# Altium PCB PCB.PcbDoc
Units mm, origin at the board's own origin, x right, y up, seen from the top; angles counter-clockwise.
Board outline 100 x 50 mm, 2 copper layers (Top Layer, Bottom Layer); 45 components, 24 nets, 126 pads, 14 vias.
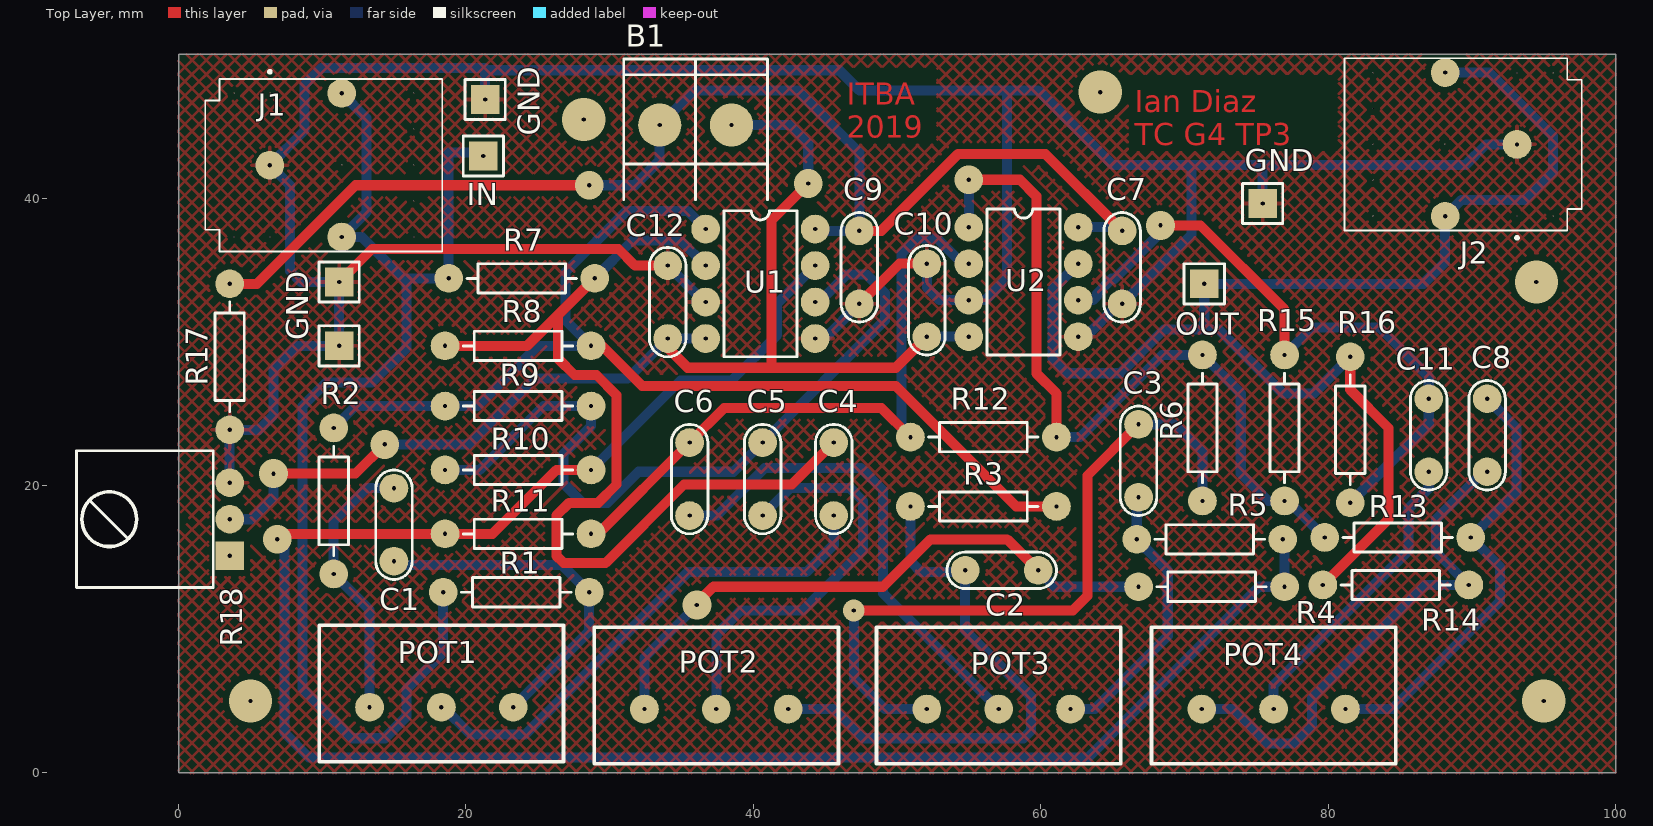
[diagram p0: Top Layer view]
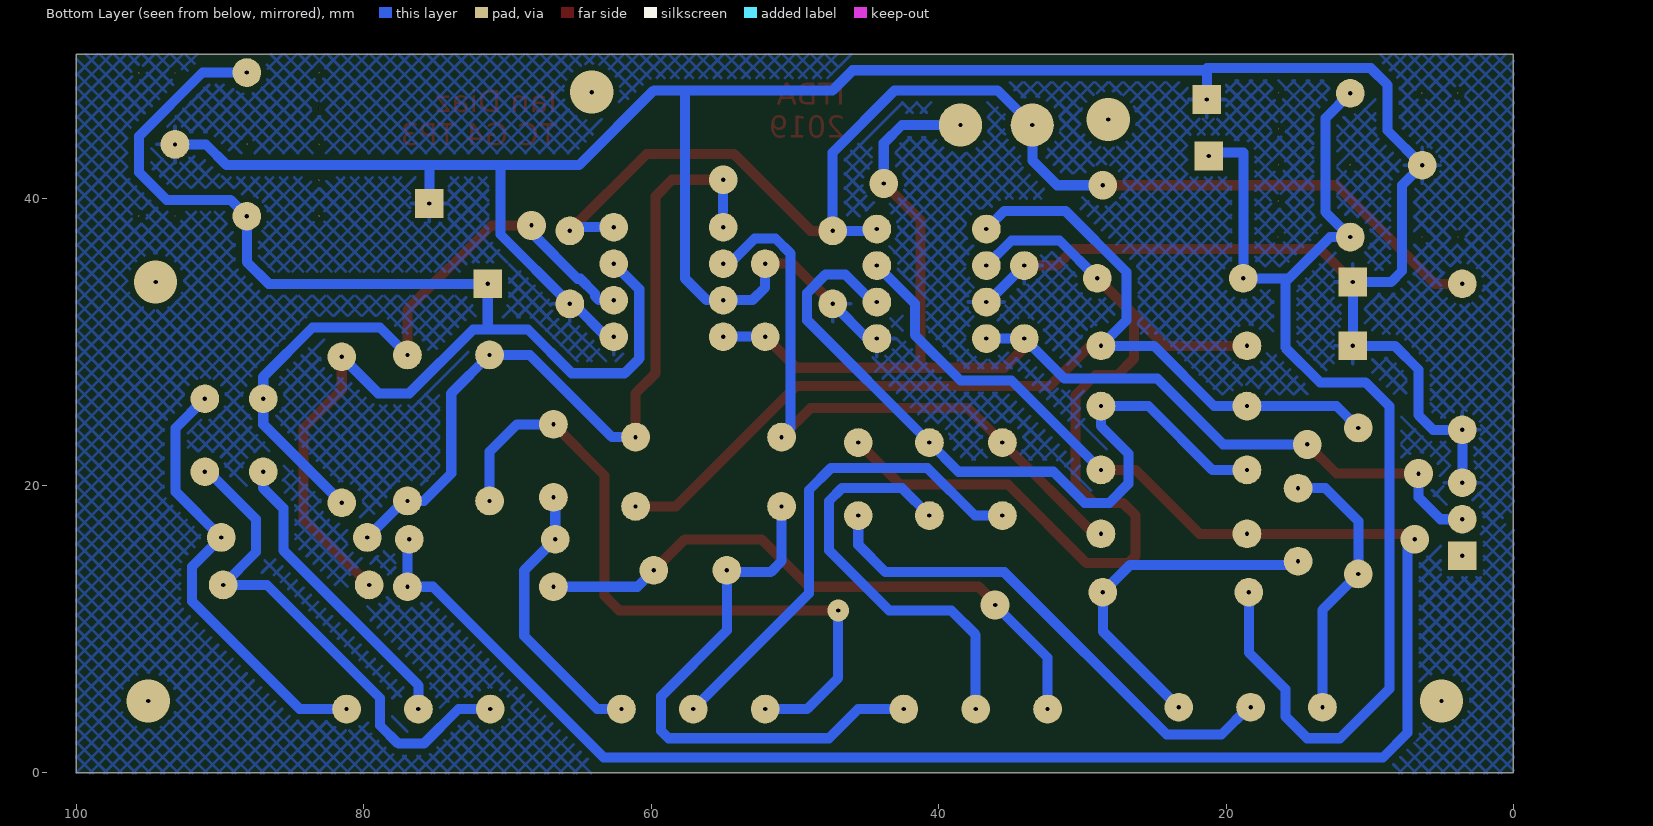
[diagram p1: Bottom Layer view, seen from below]
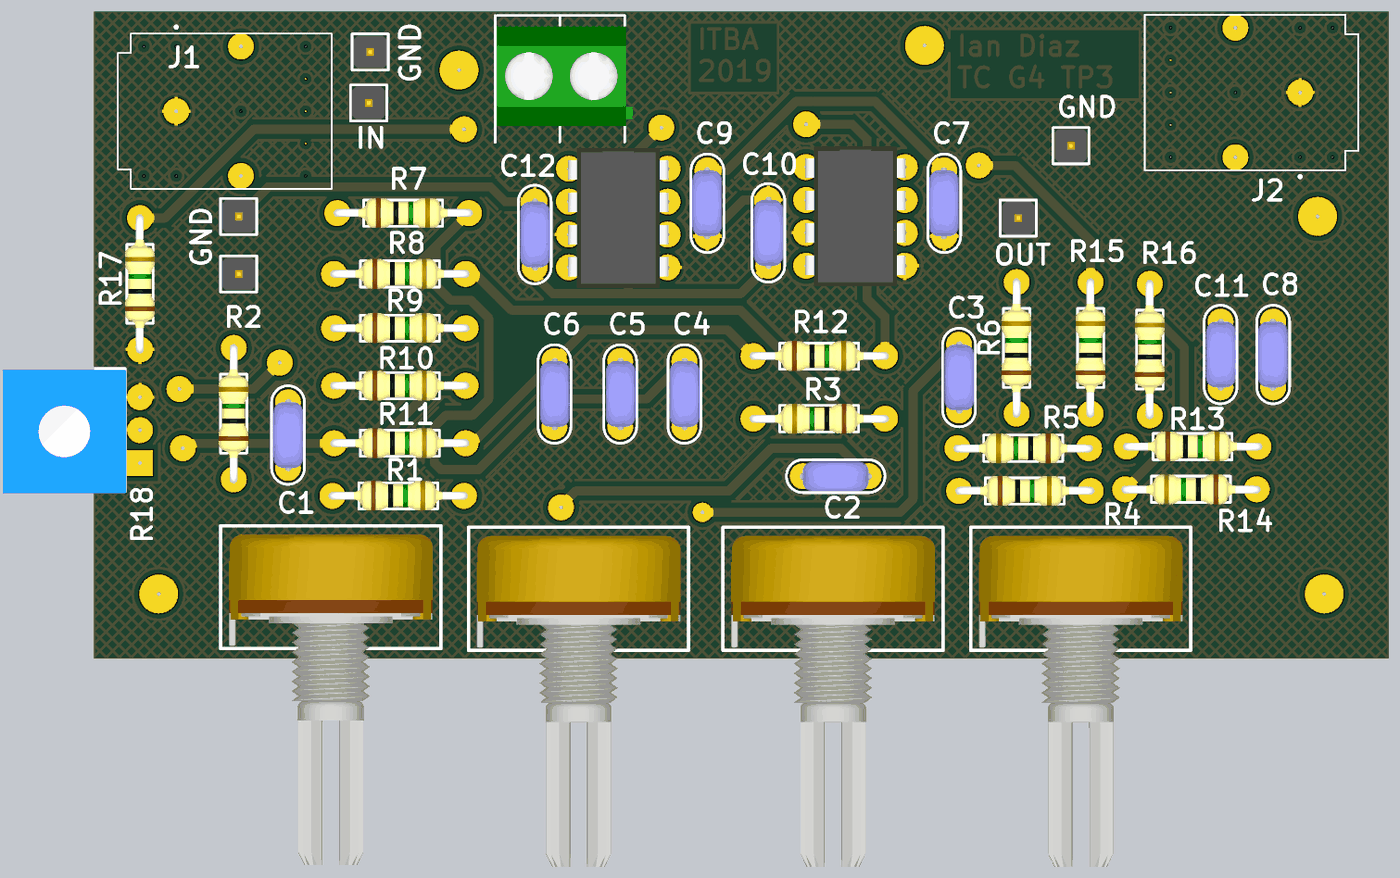
[diagram p2: 3D render of the assembled board from above, using the file's embedded part models]

## Layer stack, top to bottom
Top Solder: solder mask 0.0102, Solder Resist, Dk 3.5
Top Layer: signal copper 0.0356
Dielectric 1: dielectric 0.32, FR-4, Dk 4.8
Bottom Layer: signal copper 0.0356
Bottom Solder: solder mask 0.0102, Solder Resist, Dk 3.5

## Board outline
0,0 0,50 100,50 100,0

## Design rules (kind name [scope] priority, off if disabled: settings)
Clearance [All] p1: gap=0.4 ignorepadtopadclearanceinfootprint=FALSE
PolygonConnect [All] p1: connectstyle=Relief reliefconductorwidth=0.254 reliefentries=4 polygonreliefangle="90 Angle" airgapwidth=0.254
RoutingVias [All] p1: holewidth=0.711 width=1.27 viastyle="Through Hole" minholewidth=0.711 minwidth=1.27 maxholewidth=0.711 maxwidth=1.27
SolderMaskExpansion [All] p1: expansion=0.102
Width [All] p1: maxlimit=0.7 minlimit=0.7 preferedwidth=0.7 minimp=50.000000 maximp=50.000000 favimp=50.000000
30 further rules are at their usual default settings.

## Components (designator, comment, footprint, x,y, rotation, side; value= is the part's Value field where it differs from the comment)
B1 "12V" BORNERA2 35.981,45.085 r270 top
C1 "390n" CAP200 14.986,17.272 r90 top
C2 "68n" CAP200 57.277,14.097 r0 top
C3 "10n" CAP200 66.802,21.717 r90 top
C4 "39n" CAP200 45.593,20.447 r90 top
C5 "6.8n" CAP200 40.64,20.447 r90 top
C6 "1n" CAP200 35.56,20.447 r90 top
C7 "100n" CAP200 65.659,35.179 r270 top
C8 "2.7n" CAP200 91.059,23.495 r270 top
C9 "100n" CAP200 47.371,35.179 r270 top
C10 "100n" CAP200 52.07,32.893 r90 top
C11 "270p" CAP200 86.995,23.495 r90 top
C12 "100n" CAP200 34.036,32.766 r90 top
GND "TP" TPTH 75.438,39.624 r0 top (schematic designator GND4)
GND "TP" TPTH 21.336,46.863 r0 top (schematic designator GND2)
GND "TP" TPTH 11.176,34.163 r0 top
GND3 "TP" TPTH 11.176,29.718 r0 top
IN "TP" TPTH 21.209,42.926 r0 top
J1 "SJ-3566AN" *CUI_SJ-3566AN 11.35,42.291 r0 top
J2 "SJ-3566AN" *CUI_SJ-3566AN 88.138,43.735 r180 top
OUT "TP" TPTH 71.374,34.036 r0 top
POT1 "10K" POTENCIOMETRO 18.288,4.572 r0 top
POT2 "10K" POTENCIOMETRO 37.418,4.445 r0 top
POT3 "10K" POTENCIOMETRO 57.07,4.445 r0 top
POT4 "10K" POTENCIOMETRO 76.2,4.445 r0 top
R1 "2K5" RES400 18.415,12.573 r0 top
R2 "2K5" RES400 10.795,13.843 r90 top
R3 "2K5" RES400 61.087,18.542 r180 top
R4 "2K5" RES400 66.802,12.954 r0 top
R5 "2K5" RES400 76.835,16.256 r180 top
R6 "2K5" RES400 71.247,18.923 r90 top
R7 "100K" RES400 18.796,34.417 r0 top
R8 "100K" RES400 18.542,29.718 r0 top
R9 "100K" RES400 18.542,25.527 r0 top
R10 "100K" RES400 18.542,21.082 r0 top
R11 "100K" RES400 18.542,16.637 r0 top
R12 "100K" RES400 50.927,23.368 r0 top
R13 "2K5" RES400 79.756,16.383 r0 top
R14 "2K5" RES400 89.789,13.081 r180 top
R15 "100K" RES400 76.962,18.923 r90 top
R16 "100K" RES400 81.534,18.796 r90 top
R17 "68K" RES400 3.556,23.876 r90 top
R18 "100K" "PRESET H" -2.286,17.613 r90 top
U1 "LM833" DIP8 36.676,37.846 r0 top
U2 "LM833" DIP8 54.991,37.973 r0 top

## Footprints (in the part's own frame and the unit in brackets; to place one, negate y for a bottom-side part, rotate by r counter-clockwise, add the part's x,y. Pads: shape width x height; smd on the part's side, far side on the other; paste and mask are expansions set on the pad)
*CUI_SJ-3566AN [mm]
  round 2 hole 0.3: 1(-5,0) 2(0,-5) 3(0,5)
  round 0.1 hole 0.1: 4(5,2.5) 5(5,0) 6(5,-2.5)
  round 0.1 hole 0.1 unplated: None(-7.5,-5) None(-7.5,5) None(-5,-5) None(-5,5) None(0,0) None(5,-5) None(5,5)
  silkscreen extent -9.5,-6 7,6.6
BORNERA2 [mm] "Bornera con Tornillos 5mm separación"
  round 3 hole 0.3: 1(0,2.5) 2(0,-2.5)
  silkscreen extent -4.6,-5 5.2,5, body extent -3.76,-4.89 3.94,5.61, height 10
CAP200 [mm]
  round 2 hole 0.3: 1(-2.54,0) 2(2.54,0)
  silkscreen extent -3.81,-1.27 3.81,1.27, body extent -2.79,-1.17 2.79,1.12, height 6.24
DIP8 [mm]
  round 2 hole 0.3: 1(0,0) 2(0,-2.54) 3(0,-5.08) 4(0,-7.62) 5(7.62,-7.62) 6(7.62,-5.08) 7(7.62,-2.54) 8(7.62,0)
  silkscreen extent 1.27,-8.89 6.35,1.27, body extent -0.06,-9.21 7.7,1.59, height 4.5
POTENCIOMETRO [mm]
  round 2 hole 0.3: 1(-5,0) 2(0,0) 3(5,0)
  silkscreen extent -8.5,-3.8 8.5,5.7, body extent -7.87,-20.53 7.87,5.03, height 20.12
"PRESET H" [mm]
  rect 2x2 hole 0.3: 1(-2.5,-5.842)
  rect 0x0 all layers, no hole: 1(-2.5,0)
  round 0 all layers, no hole: 2(0.04,-2.54) 3(2.58,0)
  round 2 hole 0.3: 2(0.04,-5.842) 3(2.58,-5.842)
  silkscreen extent -4.72,-4.7 4.8,4.83, body extent -4.83,-4.76 4.7,4.77, height 5
RES400 [mm]
  round 2 hole 0.3: 1(0,0) 2(10.16,0)
  silkscreen extent 1.27,-1.02 8.89,1.02, body extent -0.3,-1.14 10.46,1.17, height 2.43
TPTH [mm]
  rect 2x2 hole 0.3: 1(0,0)
  silkscreen extent -1.4,-1.4 1.4,1.4, body extent -1.27,-1.27 1.27,1.27, height 6.04

## Part data
B1: library part "BORNERA 2"
C1 C2 C3 C4 C5 C6 C7 C8 C9 C10 C11 C12: library part CAP
J1 J2: "3.5 mm, Stereo, Right Angle, Through Hole, SPDT Switch, Audio Jack Connector", Package=None, CUI_purchase_URL=https://www.cui.com/product/interconnect/connectors/audio-connectors/jacks/sj-356xn-series?utm_source=snapeda.com&utm_medium=referral&utm_campaign=snapedaBOM, Digi-Key_Part_Number=CP-SJ-3566AN-ND, Digi-Key_Purchase_URL=https://www.digikey.com/product-detail/en/cui-inc/SJ-3566AN/CP-SJ-3566AN-ND/305112?utm_source=snapeda&utm_medium=aggregator&utm_campaign=symbol, MF="CUI Inc.", MP=SJ-3566AN, SnapEDA_Link=https://www.snapeda.com/parts/SJ-3566AN/CUI%20Inc./view-part/?ref=snap
POT1 POT2 POT3 POT4: library part POTENCIOMETRO
R1 R2 R3 R4 R5 R6 R7 R8 R9 R10 R11 R12 R13 R14 R15 R16 R17: library part RES
R18: library part PRESET
U1 U2: "Dual Audio Operational Amplifier"

## Via types
v1: diameter 2, hole 0.3, Top Layer to Bottom Layer, 8 vias
v2: diameter 3, hole 0.3, Top Layer to Bottom Layer, 5 vias
v3: diameter 1.5, hole 0.3, Top Layer to Bottom Layer, 1 vias

## Nets (pads, with @x,y where several pads share a name; then routed paths per layer and width w, separated by ;. In a path a pad name is that pad's centre, name@x,y a point inside that pad or via, vN(x,y) a via of type N, cw(c..) or ccw(c..) an arc to the next point about the centre after c; other vN are vias at no path point)
GND: C7.2 C9.2 C10.2 C12.2 GND3.1 GND.1 J1.1 J2.1 R17.1 R18.3@3.556,20.193 U1.3 U1.5 U2.3 U2.5 | length 206.3
  Top Layer w0.7: GND.1@11.176,34.163 13.462,36.449 30.607,36.449 31.75,35.306 C12.2 ; C9.2 50.165,35.433 C10.2
  Bottom Layer w0.7: R18.3@3.556,20.193 R17.1 5.588,23.876 6.604,24.892 6.604,28.067 8.255,29.718 GND3.1 11.176,34.163 8.509,34.163 7.747,34.925 7.747,40.894 J1.1 8.763,44.704 8.763,47.879 9.925,49.041 21.336,49.041 21.336,48.895 ; GND.1@21.336,46.863 21.336,48.895 ; C12.2 36.576,32.766 U1.3 ; U1.5 44.958,30.226 C9.2 ; C10.2 52.07,33.782 52.959,32.893 U2.3 56.134,32.893 57.658,34.417 57.658,47.498 ; U2.5 63.119,30.353 65.405,32.639 C7.2 70.485,37.465 70.485,42.291 ; GND.1@75.438,39.624 75.438,42.164 75.565,42.291 ; J2.1 90.979,43.735 89.535,42.291 75.565,42.291 ; 21.336,48.895 45.974,48.895 47.371,47.498 57.658,47.498 ; 57.658,47.498 59.817,47.498 65.024,42.291 70.485,42.291 ; 70.485,42.291 75.565,42.291
Input1: IN.1 J1.2 J1.3 R1.1 R7.1 | length 83.8
  Bottom Layer w0.7: J1.3 13.081,45.56 13.081,39.022 J1.2 12.747,37.291 15.621,34.417 ; R1.1 18.415,8.382 15.875,5.842 15.875,3.937 14.351,2.413 12.065,2.413 8.636,5.842 8.636,25.527 10.287,27.178 13.462,27.178 15.875,29.591 15.875,34.163 15.621,34.417 ; IN.1@21.209,43.18 18.796,43.18 R7.1 15.621,34.417
NetC1_1: C1.1 POT1.3 R1.2 | length 24.7
  Bottom Layer w0.7: C1.1 15.24,14.478 26.67,14.478 R1.2 28.575,9.859 POT1.3
NetC1_2: C1.2 POT1.1 R2.1 | length 19.1
  Bottom Layer w0.7: POT1.1 13.288,11.35 R2.1 10.795,17.526 13.081,19.812 C1.2
NetC2_1: C2.1 POT2.3 R3.2 | length 39
  Bottom Layer w0.7: POT2.3 45.593,4.445 47.625,2.413 58.801,2.413 59.309,2.921 59.309,5.334 54.737,9.906 C2.1 54.61,13.97 51.689,13.97 50.927,14.732 R3.2
NetC2_2: C2.2 POT2.1 R4.1 | length 42.5
  Top Layer w0.7: v1@36.195,11.938 37.211,12.954 49.022,12.954 52.324,16.256 57.658,16.256 C2.2
  Bottom Layer w0.7: POT2.1 32.418,8.034 v1(36.068,11.684) ; C2.2 60.96,12.954 R4.1
NetC3_1: C3.1 POT3.3 R5.2 | length 19.5
  Bottom Layer w0.7: POT3.3 63.754,4.445 68.834,9.525 68.834,14.097 R5.2 66.675,19.05 C3.1
NetC3_2: C3.2 POT3.1 R6.1 | length 49
  Top Layer w0.7: v3(46.99,11.303) 62.23,11.303 63.246,12.319 63.246,20.701 C3.2
  Bottom Layer w0.7: v3@46.99,10.922 46.99,6.604 49.149,4.445 POT3.1 ; C3.2 69.342,24.257 71.247,22.352 R6.1
NetC4_1: C4.1 POT1.2 | length 35.6
  Bottom Layer w0.7: POT1.2 18.415,4.572 20.32,2.667 24.13,2.667 35.433,13.97 43.688,13.97 45.593,15.875 C4.1
NetC4_2: C4.2 R7.2 R8.1 U1.2 | length 67.2
  Top Layer w0.7: R8.1 24.257,29.718 26.416,31.877 ; R7.2 26.416,31.877 ; C4.2 42.672,20.066 35.179,20.066 29.718,14.605 26.797,14.605 26.289,15.113 26.289,17.907 27.178,18.796 29.21,18.796 30.48,20.066 30.48,26.289 29.083,27.686 27.559,27.686 26.416,28.829 26.416,31.877
  Bottom Layer w0.7: R7.2 31.595,37.056 34.926,37.056 U1.2
NetC5_1: C5.1 POT2.2 | length 29.4
  Bottom Layer w0.7: POT2.2 37.418,9.605 39.116,11.303 43.434,11.303 47.625,15.494 47.625,18.923 46.736,19.812 42.545,19.812 C5.1
NetC5_2: C5.2 R9.2 R10.1 U1.6 | length 54.4
  Bottom Layer w0.7: R10.1 20.955,21.082 25.4,25.527 R9.2 28.702,24.13 26.797,22.225 26.797,20.113 28.114,18.796 29.845,18.796 32.004,20.955 38.608,20.955 C5.2 49.149,31.496 49.149,33.401 47.879,34.671 46.482,34.671 44.577,32.766 U1.6
NetC6_1: C6.1 POT3.2 | length 34
  Bottom Layer w0.7: C6.1 37.465,17.907 40.767,21.209 47.498,21.209 49.022,19.685 49.022,12.493 POT3.2
NetC6_2: C6.2 R11.2 R12.1 U2.2 | length 45.6
  Top Layer w0.7: R11.2 29.21,16.637 C6.2 37.973,25.4 48.895,25.4 R12.1
  Bottom Layer w0.7: R12.1 50.292,24.003 50.292,36.13 51.345,37.183 52.795,37.183 54.545,35.433 U2.2
NetC8_1: C8.1 POT4.3 R13.2 | length 30.9
  Bottom Layer w0.7: POT4.3 84.455,4.445 91.948,11.938 91.948,14.351 R13.2 93.091,19.558 93.091,24.003 C8.1
NetC8_2: C8.2 POT4.1 R14.1 | length 35.7
  Bottom Layer w0.7: POT4.1 73.406,4.445 75.819,2.032 77.597,2.032 78.867,3.302 78.867,5.207 86.741,13.081 R14.1 87.503,15.367 87.503,17.653 90.805,20.955 C8.2
NetC11_1: C11.1 POT4.2 | length 21
  Bottom Layer w0.7: POT4.2 76.2,6.096 85.598,15.494 85.598,18.415 86.995,19.812 C11.1
NetC11_2: C11.2 R15.2 R16.1 U2.6 | length 45.6
  Top Layer w0.7: v1(68.326,38.1) 71.12,38.1 76.962,32.258 R15.2
  Bottom Layer w0.7: U2.6 63.627,32.893 63.909,33.175 63.909,33.364 64.934,34.389 65.123,34.389 68.181,37.447 v1@68.181,37.973 ; R15.2 78.867,30.988 83.566,30.988 86.995,27.559 C11.2 86.995,24.257 R16.1
NetR2_2: R2.2 R3.1 R8.2 R9.1 U1.1 | length 75.2
  Top Layer w0.7: R8.2 29.464,29.718 32.258,26.924 49.911,26.924 58.293,18.542 R3.1
  Bottom Layer w0.7: R2.2 12.319,25.527 R9.1 20.828,25.527 25.019,29.718 R8.2 26.924,31.496 26.924,34.86 31.18,39.116 35.406,39.116 U1.1
NetR4_2: R4.2 R5.1 R10.2 R11.1 U1.7 | length 138.6
  Top Layer w0.7: v1@6.811,16.336 6.858,16.289 v1(6.858,16.256) 7.239,16.637 R11.1 21.844,16.637 26.289,21.082 R10.2
  Bottom Layer w0.7: v1@7.112,16.002 7.366,15.748 7.366,2.794 9.082,1.078 63.308,1.078 75.184,12.954 R4.2 76.962,16.129 R5.1 ; R10.2 34.925,27.305 38.481,27.305 41.656,30.48 41.656,32.666 U1.7
Out: J2.2 J2.3 OUT.1 R14.2 R16.2 U2.7 | length 95.9
  Top Layer w0.7: R14.2 84.201,17.653 84.201,24.003 81.534,26.67 R16.2
  Bottom Layer w0.7: U2.7 60.833,33.655 60.833,28.829 61.849,27.813 65.532,27.813 68.58,30.861 71.374,30.861 ; R16.2 78.994,26.416 76.835,26.416 72.39,30.861 71.374,30.861 ; J2.2 91.219,48.735 95.631,44.323 95.631,41.783 93.726,39.878 89.281,39.878 J2.3 88.138,35.56 86.614,34.036 OUT.1 71.374,30.861
ult: R6.2 R12.2 R13.1 R15.1 U2.1 | length 55.4
  Top Layer w0.7: v1(54.991,41.275) 58.547,41.275 59.69,40.132 59.69,27.813 61.087,26.416 R12.2
  Bottom Layer w0.7: U2.1 v1(54.991,41.275) ; R12.2 62.738,23.368 68.453,29.083 R6.2 73.914,26.416 73.914,20.828 75.819,18.923 R15.1 77.216,18.923 R13.1
VCC: B1.2 C7.1 C9.1 R17.2 U1.8 U2.8 | length 87.1
  Top Layer w0.7: R17.2 5.461,34.036 12.319,40.894 v1(28.575,40.894) ; C9.1 48.895,37.719 54.229,43.053 60.325,43.053 C7.1
  Bottom Layer w0.7: v1(28.575,40.894) 31.75,40.894 33.481,42.625 B1.2 35.894,47.498 43.053,47.498 47.371,43.18 C9.1 44.423,37.719 U1.8 ; U2.8 65.405,37.973 C7.1
VEE: B1.1 C10.1 C12.1 R18.2@3.556,17.653 U1.4 U2.4 | length 84.6
  Top Layer w0.7: v1(6.604,20.828) 12.319,20.828 v1(14.351,22.86) ; C12.1 34.036,29.591 35.433,28.194 41.275,28.194 ; v1(43.815,41.021) 41.275,38.481 41.275,28.194 ; C10.1 49.911,28.194 41.275,28.194
  Bottom Layer w0.7: R18.2@3.556,17.653 5.08,17.653 6.604,19.177 v1@6.604,20.574 ; v1(14.351,22.86) 20.193,22.86 24.765,27.432 31.242,27.432 C12.1 U1.4 ; B1.1 42.545,45.085 43.815,43.815 v1(43.815,41.021) ; C10.1 U2.4
pads on no net: J1.4 J1.5 J1.6 J1.None J2.4 J2.5 J2.6 J2.None R18.1 R18.2@0.254,17.653 R18.3@-2.286,20.193
copper on no net:
  other v2: 5,5 95,5 94.488,34.163 28.194,45.466 64.135,47.371

## Polygon pours and split planes (outlines as drawn)
GND on Top Layer (hatched 45Degree grid 0.7 track 0.2, remove dead copper, pour order 2): 0,0 100,0 100,50 0,50
GND on Bottom Layer (hatched 45Degree grid 0.7 track 0.2, remove dead copper, pour order 4): 0,0 100,0 100,50 0,50

## Other copper
Top Layer:
  text "ITBA / 2019" at 46.482,44.196 h1.52
  text "Ian Diaz / TC G4 TP3" at 66.548,43.688 h1.52